# EAGLE board Cricket_Re (EAGLE 6.0)
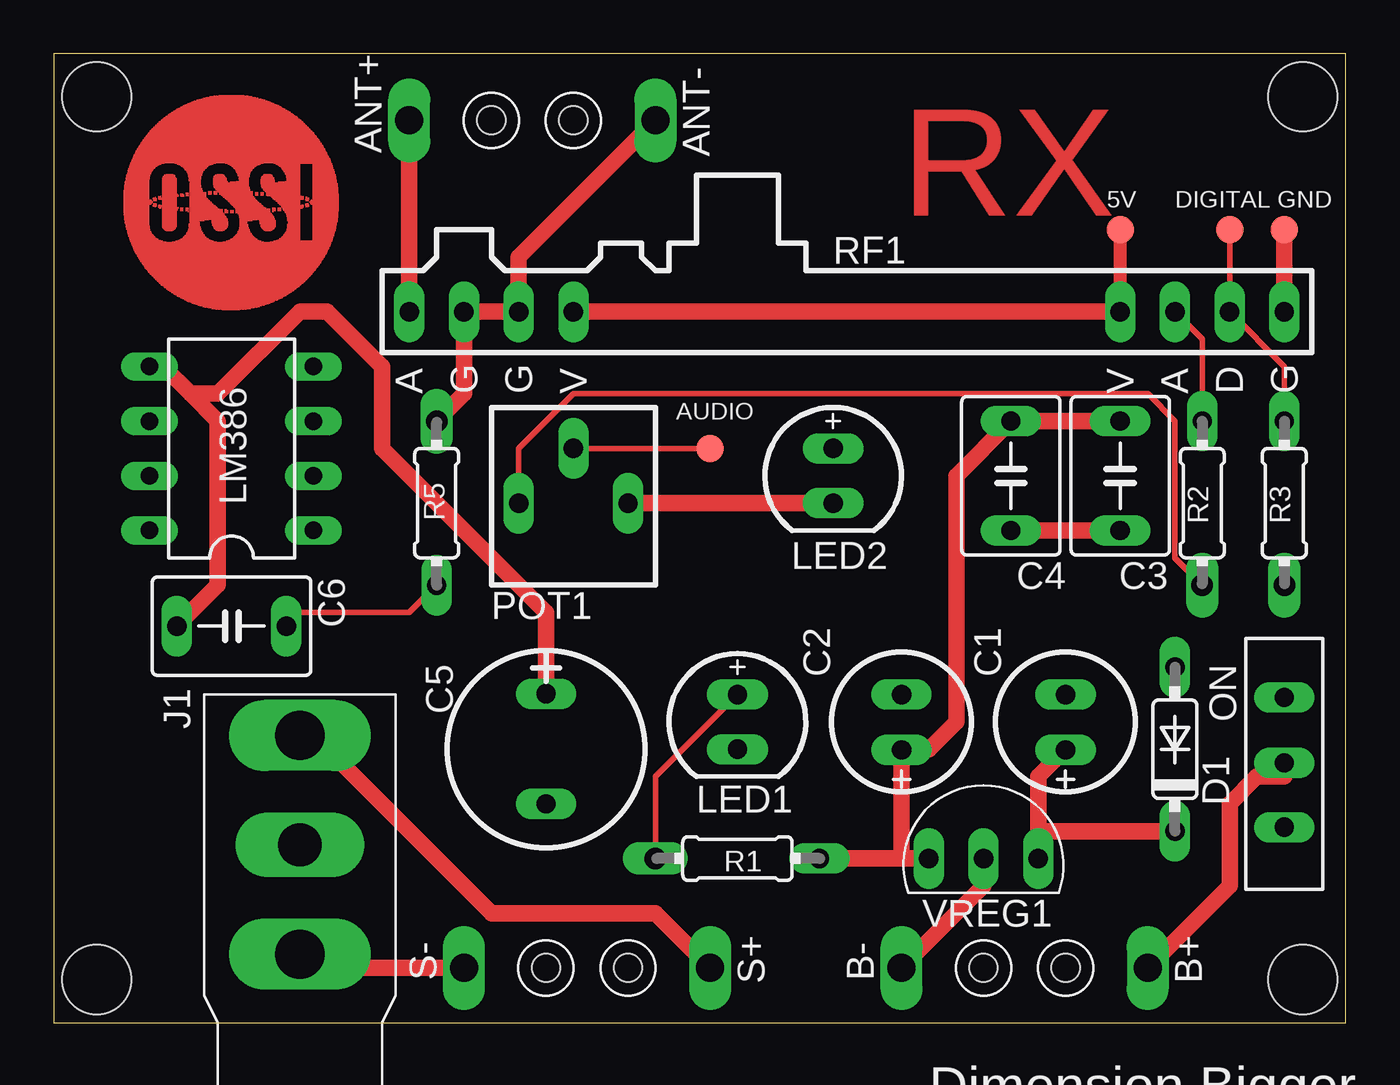
[diagram p0: board, top side]
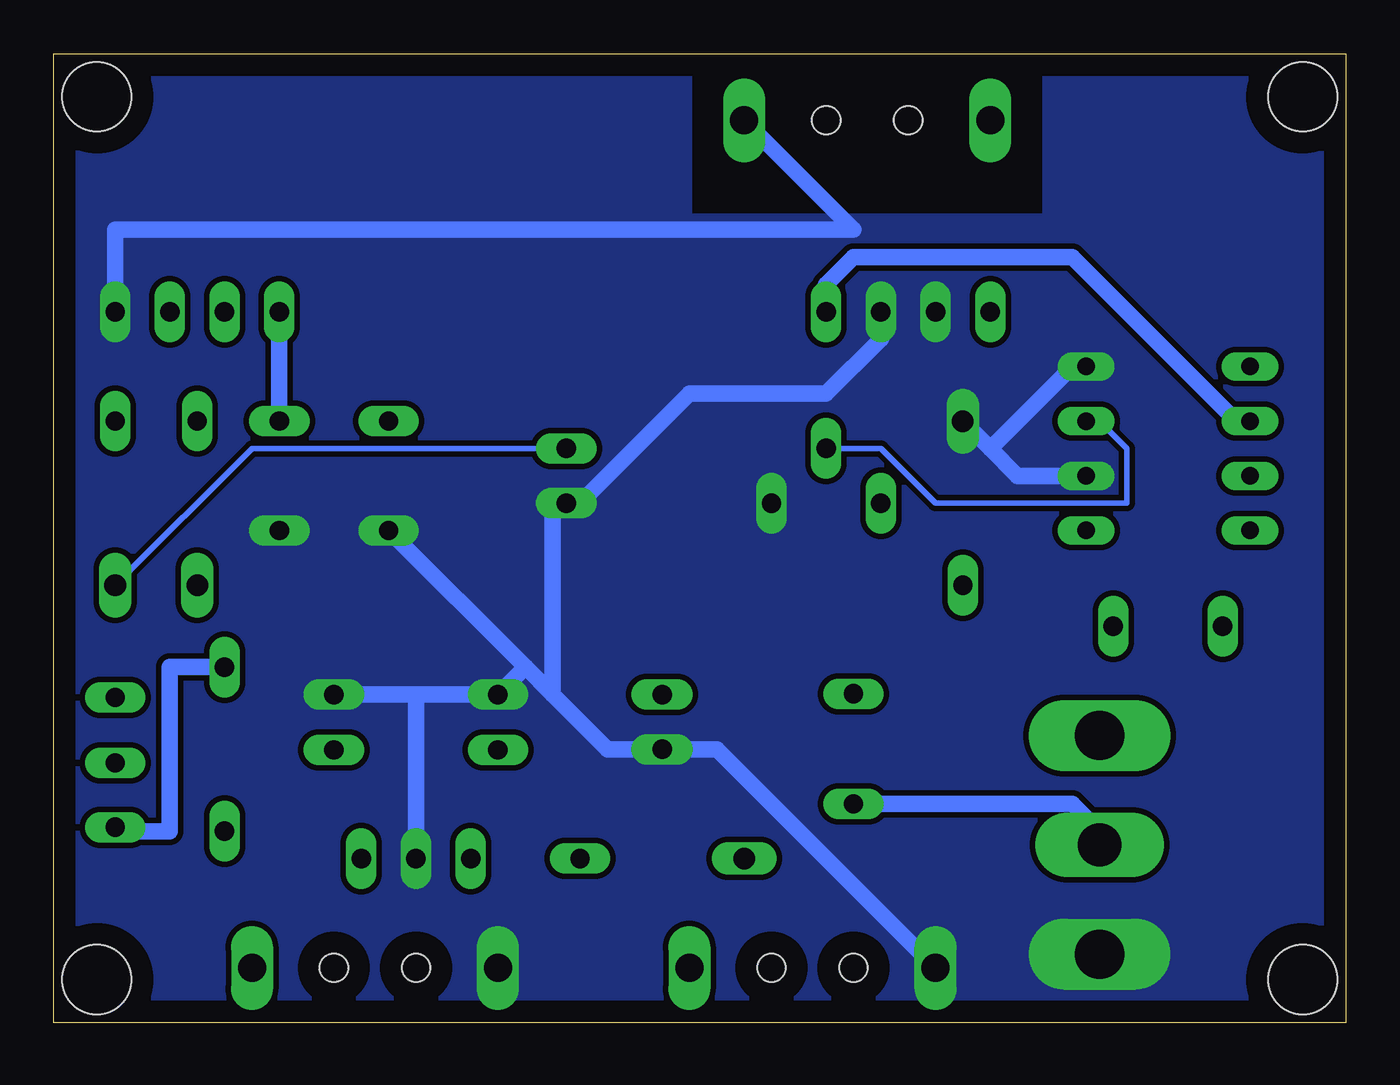
[diagram p1: board, bottom side, seen from below]

Size 60 x 45 mm. Coordinates in mm from the lower left corner, seen from the top.
Outline: 0,0 60,0 60,45 0,45 0,0
Copper layers (1*16): Top 0.035mm / dielectric 1.5mm / Bottom 0.035mm
Design rules: minimum track width 10mil, minimum drill 24mil, track to track 8mil, track to pad 8mil, pad to pad 8mil, via to via 8mil, smd to smd 8mil, copper to edge 40mil, drill to drill 8mil, minimum pad ring 10mil, minimum via ring 8mil, stop-mask expansion 4mil, vias tented up to drill 0mil, thermal gap 10mil
Net classes: 1 power: width 0.762 mm, clearance 0.254 mm
Holes 3.2 mm at 2,2 2,43 58,43 58,2

## Footprints (pad centres in the part's own frame; a part is rotated, then mirrored left to right if it is on the bottom)
B1,27 = smd 1.27 x 1.27: PP 0,0
FIXPAD = drill 1.3 long: P$1 0,0 | hole 1.3: 0,-3.81
CAPACITOR_POL = drill 0.9 pad 1.27 long: + -1.302,0; - 1.27,0
CAPACITOR = drill 0.9 pad 1.27 long: P$1 -2.54,0; P$2 2.54,0
CAPACITOR_POL_R10 = drill 0.9 pad 1.27 long: + -2.572,0; - 2.54,0
1N4148 = drill 0.9 pad 1.27 long: A 3.81,0; C -3.81,0
AUDIOJACK = drill 2 pad 2.54 long: A -0.635,0 | drill 2.286 pad 3.048 long: G -5.715,0; S 4.445,0
LED = drill 0.9 pad 1.422 long: A -1.27,0; C 1.27,0
DIL08 = drill 0.813 long: 1 -3.81,-3.81; 2 -1.27,-3.81; 3 1.27,-3.81; 4 3.81,-3.81; 5 3.81,3.81; 6 1.27,3.81; 7 -1.27,3.81; 8 -3.81,3.81
POT = drill 0.9 pad 1.27 long: 1 -2.54,0; 2 2.54,0; C 0,2.54
RESISTOR = drill 1 pad 1.27 long: P$1 -3.81,0 | drill 0.9 pad 1.27 long: P$2 3.81,0
RWS-434 = drill 0.9 pad 1.27 long: 1 0,-20.32; 2 0,-17.78; 3 0,-15.24; 4 0,-12.7; 5 0,12.7; 6 0,15.24; 7 0,17.78; 8 0,20.32
SLIDE = drill 0.9 pad 1.27 long: 1 -2.99,0; 2 0,0; 3 3.04,0
78L05 = drill 0.9 pad 1.27 long: G 0,0; I 2.54,0; O -2.54,0

## Placement (x,y rotation side)
5V  TPB1,27  [B1,27]  49.53,36.83 0 top
ANT+  FIXPAD  [FIXPAD]  16.51,41.91 90 top
ANT-  FIXPAD  [FIXPAD]  27.94,41.91 270 top
AUDIO  TPB1,27  [B1,27]  30.48,26.67 0 top
B+  FIXPAD  [FIXPAD]  50.8,2.54 270 top
B-  FIXPAD  [FIXPAD]  39.37,2.54 90 top
C1  47uF  [CAPACITOR_POL]  46.99,13.97 90 top
C2  10uF  [CAPACITOR_POL]  39.37,13.97 90 top
C3  0.1uF  [CAPACITOR]  49.53,25.4 270 top
C4  0.1uF  [CAPACITOR]  44.45,25.4 270 top
C5  220uF  [CAPACITOR_POL_R10]  22.86,12.7 270 top
C6  0.1uF  [CAPACITOR]  8.26,18.41 0 top
D1  1N4148  [1N4148]  52.07,12.7 90 top
DIGITAL  TPB1,27  [B1,27]  54.61,36.83 0 top
GND  TPB1,27  [B1,27]  57.15,36.83 0 top
J1  AUDIOJACK  [AUDIOJACK]  11.43,8.89 90 top
LED1  [LED]  31.75,13.97 270 top
LED2  [LED]  36.2,25.4 270 top
LM386  [DIL08]  8.26,26.67 90 top
POT1  POT  [POT]  24.13,24.13 0 top
R1  470  [RESISTOR]  31.75,7.62 0 top
R2  220k  [RESISTOR]  53.34,24.13 90 top
R3  1k  [RESISTOR]  57.15,24.13 90 top
R5  10  [RESISTOR]  17.78,24.13 270 top
RF1  RWS-434  [RWS-434]  36.83,33.02 90 top
S+  FIXPAD  [FIXPAD]  30.48,2.54 270 top
S-  FIXPAD  [FIXPAD]  19.05,2.54 90 top
SWITCH  SLIDE  [SLIDE]  57.15,12.06 90 top
U$1  OSSILOGO-10  [OSSILOGO1010]  8.26,38.1 0 top
VREG1  78L05  [78L05]  43.18,7.62 0 top

## Library data of the parts
5V AUDIO DIGITAL GND = testpad
ANT+ ANT- B+ B- S+ S- = lbr\Hole
C1-C6 POT1 R1-R3 R5 = RCcomponent
D1 LED1 LED2 = Power
J1 = Connector
LM386 = ic-package
RF1 = RFmodule
SWITCH = Switch
U$1 = OSSI
VREG1 = lbr\Power

## Nets
C1 [power]: C1.+ D1.C VREG1.I
C3 [power]: 5V.PP C2.+ C3.P$1 C4.P$1 LM386.6 R1.P$2 RF1.4 RF1.5 VREG1.O
C5 [power]: C5.+ C6.P$1 LM386.5
GND [power]: ANT-.P$1 B-.P$1 C1.- C2.- C3.P$2 C4.P$2 GND.PP J1.G LED1.C LED2.C LM386.2 LM386.4 POT1.2 R5.P$1 RF1.1 RF1.6 RF1.7 S-.P$1 VREG1.G
N$1: D1.A SWITCH.1
N$2 [power]: B+.P$1 SWITCH.2
N$4: LED2.A R3.P$1
N$5: DIGITAL.PP R3.P$2 RF1.2
N$6: POT1.1 R2.P$1
N$7: LED1.A R1.P$1
N$8 [power]: ANT+.P$1 RF1.8
N$9 [power]: C5.- J1.A
N$10: AUDIO.PP LM386.3 POT1.C
N$11: R2.P$2 RF1.3
N$12: C6.P$2 R5.P$2
SPK2 [power]: J1.S S+.P$1

## Tracks (layer width: path | path; a pad name or v marks a point on that pad's centre or on a via)
C1
  Top 0.762: 45.72,8.89 45.72,11.43 46.99,12.7 C1.+ | 45.72,8.89 D1.C | VREG1.I 45.72,8.89
C3
  Top 0.61: RF1.4 5V.PP
  Top 0.762: 39.37,7.62 VREG1.O | 39.37,7.62 R1.P$2 | 39.37,7.62 C2.+ 39.37,12.7 40.64,12.7 41.91,13.97 41.91,25.4 C4.P$1 C3.P$1 | RF1.5 RF1.4
  Bottom 0.762: RF1.5 24.13,34.29 22.86,35.56 12.7,35.56 5.08,27.94 LM386.6 | RF1.4 C3.P$1
C5
  Top 0.762: 6.35,29.21 7.62,27.94 7.62,20.32 C6.P$1 | 6.35,29.21 5.08,30.48 LM386.5 | 6.35,29.21 7.62,29.21 11.43,33.02 12.7,33.02 15.24,30.48 15.24,26.67 22.86,19.05 C5.+ 22.86,15.24
GND
  Top 0.762: R5.P$1 19.05,29.21 RF1.7 RF1.6 21.59,35.56 ANT-.P$1 | RF1.1 GND.PP | B-.P$1 43.18,6.35 VREG1.G | S-.P$1 11.43,2.54 J1.G | LED2.C POT1.2 | C4.P$2 C3.P$2
  Bottom 0.762: R5.P$1 16.51,26.67 | 16.51,26.67 15.24,25.4 LM386.2 | 16.51,26.67 12.7,30.48 LM386.4 | RF1.1 GND.PP 22.86,36.83 ANT-.P$1 | 43.18,15.24 C1.- | C2.- 43.18,15.24 | C1.- | 43.18,15.24 VREG1.G | 38.1,16.51 C4.P$2 | 36.83,15.24 38.1,16.51 | 36.83,15.24 34.29,12.7 LED1.C 29.21,12.7 S-.P$1 | 36.83,15.24 36.83,24.13 LED2.C 35.56,24.13 30.48,29.21 24.13,29.21 21.59,31.75 RF1.6 | 38.1,16.51 C2.- | C2.-
  pour Bottom (no thermals): 0,0 0,45.09 13.97,45.09 13.97,37.47 30.48,37.47 30.48,45.09 60.01,45.09 60.01,44.77 60.01,37.47 60.01,0
N$1
  Bottom 0.406: 57.15,8.89 SWITCH.1
  Bottom 0.762: D1.A 54.61,16.51 54.61,8.89 57.15,8.89
N$2
  Top 0.762: B+.P$1 54.61,6.35 54.61,10.16 55.88,11.43 57.15,11.43 SWITCH.2
N$4
  Bottom 0.254: R3.P$1 50.8,26.67 LED2.A
N$5
  Top 0.254: DIGITAL.PP RF1.2 57.15,30.48 R3.P$2
N$6
  Top 0.254: POT1.1 21.59,26.67 24.13,29.21 50.8,29.21 52.07,27.94 52.07,21.59 R2.P$1
N$7
  Top 0.254: LED1.A 27.94,11.43 R1.P$1
N$8
  Top 0.762: RF1.8 ANT+.P$1
N$9
  Bottom 0.762: C5.- 12.7,10.16 11.43,8.89 J1.A | C5.-
N$10
  Top 0.254: POT1.C AUDIO.PP
  Bottom 0.254: POT1.C 21.59,26.67 19.05,24.13 10.16,24.13 10.16,26.67 11.43,27.94 LM386.3
N$11
  Top 0.254: R2.P$2 53.34,31.75 RF1.3
N$12
  Top 0.254: R5.P$2 16.51,19.05 11.43,19.05 C6.P$2
SPK2
  Top 0.762: S+.P$1 27.94,5.08 20.32,5.08 11.43,13.97 J1.S

## Text on the board
Top: RX
tPlace: Digital / GND thruhole | GND plane isolation space | ON | Dimension Bigger
tStop: RX